# Altium PCB Control.PcbDoc
Units mil, origin at the board's own origin, x right, y up, seen from the top; angles counter-clockwise.
Board outline 3347.04 x 2686.23 mil, 2 copper layers (Top Layer, Bottom Layer); 27 components, 23 nets, 148 pads, 106 vias.
Unrouted connection lines stored in the file: 1.
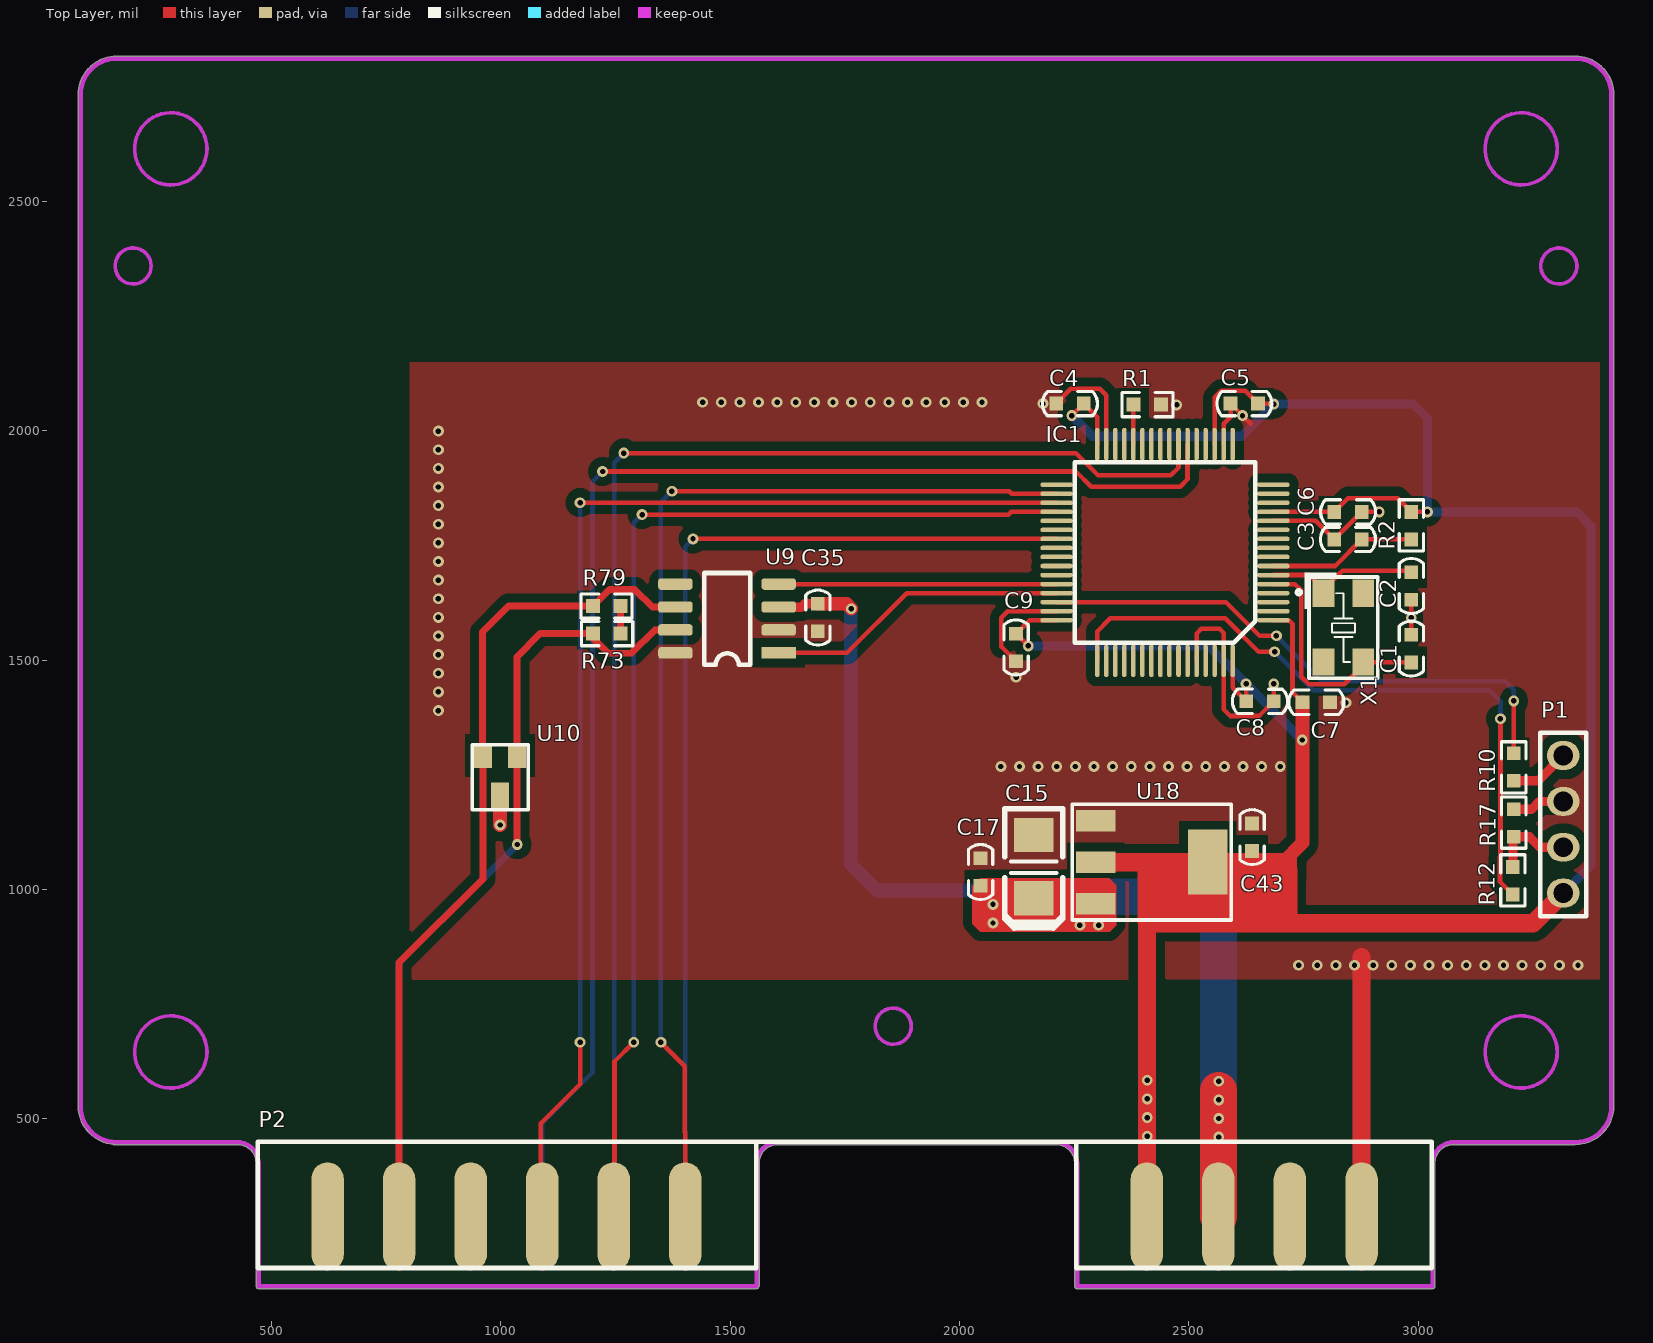
[diagram p0: Top Layer view]
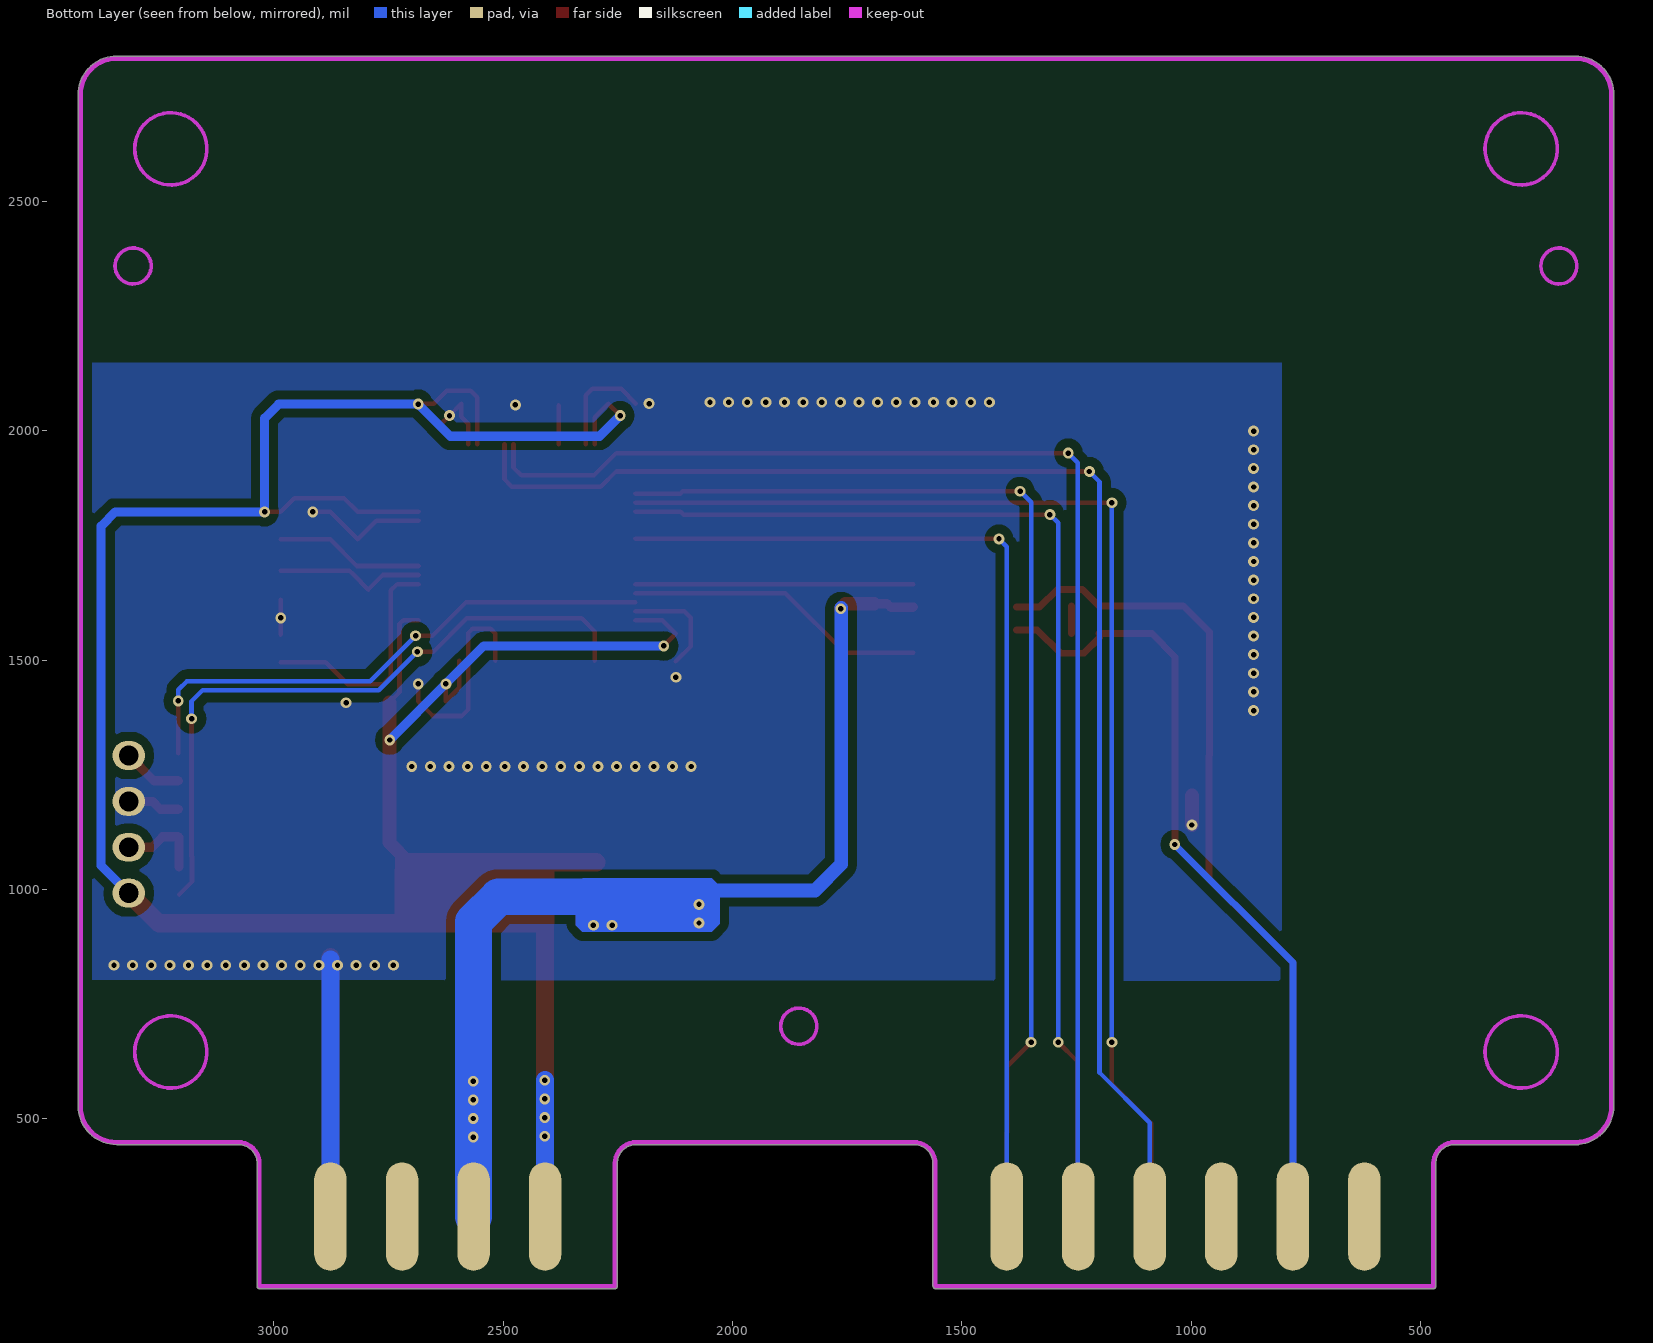
[diagram p1: Bottom Layer view, seen from below]
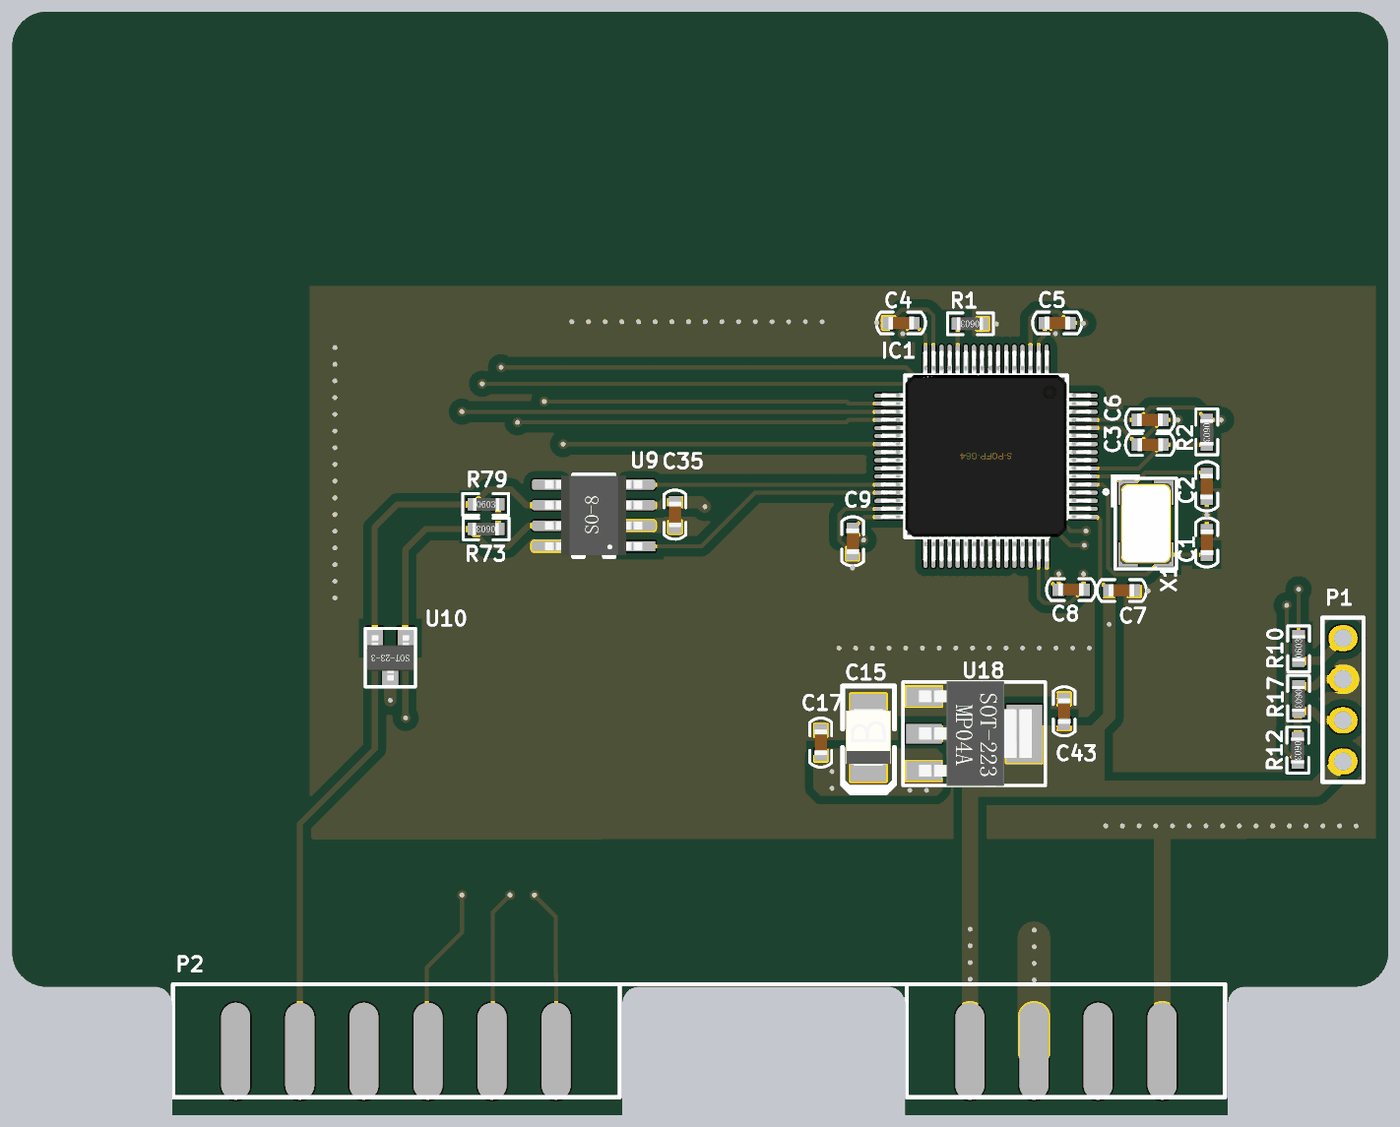
[diagram p2: 3D render of the assembled board from above, using the file's embedded part models]

## Layer stack, top to bottom
Top Layer: signal copper 1.4
Dielectric: core 12.6, FR-4, Dk 4.8
Bottom Layer: signal copper 1.4

## Board outline
466.99,135 ccw(c472,135) 472,129.99 1557,129.99 ccw(c1557,135) 1561.01,131.99 ccw(c1558,136) 1563.01,136 1563.01,403 cw(c1604,403) 1604,443.99 2210,443.99 cw(c2210,403) 2250.99,403 2250.99,135 ccw(c2256,135) 2256,129.99 3031,129.99 ccw(c3031,135) 3036.01,135 3036.01,403 cw(c3077,403) 3077,443.99 3341,443.99 ccw(c3341,449) 3341.63,444.03 ccw(c3342.27,449) 3342.27,443.99 ccw(c3342.27,527.74) 3426.02,527.74 3426.02,2732.46 ccw(c3342.27,2732.46) 3342.27,2816.22 163,2816.22 ccw(c163,2811.2) 162.87,2816.22 ccw(c162.74,2811.2) 162.74,2816.22 ccw(c162.74,2732.46) 78.99,2732.46 78.99,527.74 ccw(c162.74,527.74) 155.18,444.33 ccw(c157,449) 157,443.99 426,443.99 cw(c426,403) 466.99,403

## Design rules (kind name [scope] priority, off if disabled: settings)
Clearance [All] p1: gap=8
PlaneConnect [All] p1: planeconnectstyle=Direct reliefexpansion=20 reliefentries=4 reliefconductorwidth=10 reliefairgap=10
PolygonConnect [All] p1: connectstyle=Direct reliefconductorwidth=10 reliefentries=4 polygonreliefangle="90 Angle" airgapwidth=10
RoutingVias [All] p1: holewidth=28 width=50 viastyle="Through Hole" minholewidth=28 minwidth=50 maxholewidth=28 maxwidth=50
SolderMaskExpansion [All] p1: expansion=4
Width [All] p1: maxlimit=90 minlimit=10 preferedwidth=10
27 further rules are at their usual default settings.

## Components (designator, comment, footprint, x,y, rotation, side; value= is the part's Value field where it differs from the comment)
C1 "20p,50V,J" C0603 2984.72,1495 r90 top
C2 "20p,50V,J" C0603 2984.72,1691.5 r270 top
C3 "100n,50V,J" C0603 2816.72,1763 r0 top
C4 "100n,50V,J" C0603 2210.72,2059 r0 top
C5 "100n,50V,J" C0603 2590.72,2059 r0 top
C6 "100n,50V,J" C0603 2876.72,1823 r180 top
C7 "100n,50V,J" C0603 2807.72,1408 r180 top
C8 "100n,50V,J" C0603 2684.72,1410.13 r180 top
C9 "100n,50V,J" C0603 2123.29,1497.57 r90 top
C15 "22uF/6.3V,K,B" 3528B 2161.72,981 r90 top
C17 "100n,50V,J" C0603 2045.72,1008 r90 top
C35 "100n,50V,J" C0603 1691.17,1562.67 r90 top
C43 "100n,50V,J" C0603 2637.72,1084 r90 top
IC1 "ARM-STM32F103RC" LQFP-64 2467.72,1740 r90 top
P1 "PH2.54-4-V" SIP4 3316,1292 r270 top
P2 "Header 10X2" 805-1 470,175 r0 top
R1 "10K,1/10W,F" R0603 2439,2057 r180 top
R2 "10K,1/10W,F" R0603 2984.74,1823 r270 top
R10 "51,1/10W,F" R0603 3208,1237 r90 top
R12 "51,1/10W,F" R0603 3206,1049 r270 top
R17 "10K,1/10W,F" R0603 3208,1175 r270 top
R73 "60.4,1/10W,F" R0603 1261.17,1557.67 r180 top
R79 "60.4,1/10W,F" R0603 1201.17,1617.67 r0 top
U9 "TJA1050 Transceiver" SOP-8 1493.17,1590.67 r180 top
U10 "NUP2105" SOT-23P 1036,1292 r180 top
U18 "LVR-AMS1117-3.3/4.75-12V" SOT-223 2296.72,1150 r270 top
X1 "8MHz,M" X5032 2791.42,1647.8 r270 top

## Footprints (in the part's own frame and the unit in brackets; to place one, negate y for a bottom-side part, rotate by r counter-clockwise, add the part's x,y. Pads: shape width x height; smd on the part's side, far side on the other; paste and mask are expansions set on the pad)
805-1 [mm]
  oval 1.8x6 smd far side: 1(61.116,2.845) 3(57.156,2.845) 5(53.196,2.845) 7(49.236,2.845) 9(23.675,2.845) 11(19.715,2.845) 13(15.755,2.845) 15(11.795,2.845) 17(7.835,2.845) 19(3.875,2.845)
  oval 1.8x6 smd: 2(61.116,2.845) 4(57.156,2.845) 6(53.196,2.845) 8(49.236,2.845) 10(23.675,2.845) 12(19.715,2.845) 14(15.755,2.845) 16(11.795,2.845) 18(7.835,2.845) 20(3.875,2.845)
  silkscreen extent 0,0 65,6.98
3528B [mm]
  rect 1.9x2.2 smd: 1(0,0) 2(3.5,0)
  silkscreen extent -1.65,-1.6 4.95,1.6, body extent 0.03,-1.4 3.53,1.4, height 1.9
C0603 [mil]
  rect 30x30 smd: 1(0,0) 2(60,0)
  silkscreen extent -30,-27 90,27, body extent -1,-16 62,15, height 24
LQFP-64 [mm]
  oval 0.25x1.8 smd: 1(-3.888,-5.492) 2(-3.388,-5.492) 3(-2.888,-5.492) 4(-2.388,-5.492) 5(-1.888,-5.492) 6(-1.388,-5.492) 7(-0.888,-5.492) 8(-0.388,-5.492) 9(0.112,-5.492) 10(0.612,-5.492) 11(1.112,-5.492) 12(1.612,-5.492) 13(2.112,-5.492) 14(2.612,-5.492) 15(3.112,-5.492) 16(3.612,-5.492) 33(3.612,6.508) 34(3.112,6.508) 35(2.612,6.508) 36(2.112,6.508) 37(1.612,6.508) 38(1.112,6.508) 39(0.612,6.508) 40(0.112,6.508) 41(-0.388,6.508) 42(-0.888,6.508) 43(-1.388,6.508) 44(-1.888,6.508) 45(-2.388,6.508) 46(-2.888,6.508) 47(-3.388,6.508) 48(-3.888,6.508)
  oval 1.8x0.25 smd: 17(5.862,-3.242) 18(5.862,-2.742) 19(5.862,-2.242) 20(5.862,-1.742) 21(5.862,-1.242) 22(5.862,-0.742) 23(5.862,-0.242) 24(5.862,0.258) 25(5.862,0.758) 26(5.862,1.258) 27(5.862,1.758) 28(5.862,2.258) 29(5.862,2.758) 30(5.862,3.258) 31(5.862,3.758) 32(5.862,4.258) 49(-6.138,4.258) 50(-6.138,3.758) 51(-6.138,3.258) 52(-6.138,2.758) 53(-6.138,2.258) 54(-6.138,1.758) 55(-6.138,1.258) 56(-6.138,0.758) 57(-6.138,0.258) 58(-6.138,-0.242) 59(-6.138,-0.742) 60(-6.138,-1.242) 61(-6.138,-1.742) 62(-6.138,-2.242) 63(-6.138,-2.742) 64(-6.138,-3.242)
  silkscreen extent -5.14,-4.49 4.86,5.51, body extent -6.65,-6.02 6.4,7.03, height 1.58
R0603 [mil]
  rect 30x30 smd: 1(0,0) 2(60,0)
  silkscreen extent -27,-27 85,27, body extent -1,-16 62,15, height 18
SIP4 [mm]
  oval 1.6x1.801 hole 1.1: 1(0,0) 2(2.54,0) 3(5.08,0) 4(7.62,0)
  silkscreen extent -1.27,-1.27 8.89,1.27
SOP-8 [mil]
  round 20 on Top Overlay: 0(-28.5,62.8)
  rect 75x25 smd: 1(-112.5,75)
  rrect50% 75x25 smd: 2(-112.5,25) 3(-112.5,-25) 4(-112.5,-75) 5(112.5,-75) 6(112.5,-25) 7(112.5,25) 8(112.5,75)
  silkscreen extent -50,-99 50,101, body extent -118,-96 118,96
SOT-23P [mm]
  rect 1x1.4 smd: 1(0,0) 2(1.9,0) 3(0.95,2.2)
  silkscreen extent -0.6,-0.6 2.5,3, body extent -0.51,-0.18 2.39,2.62
SOT-223 [mm]
  rect 1.2x2.2 smd: 1(0,0) 2(2.3,0) 3(4.6,0)
  rect 3.6x2.2 smd: 4(2.3,6.2)
  silkscreen extent -0.9,-1.3 5.5,7.5, body extent -0.97,-0.31 5.53,6.66
X5032 [mm]
  rect 1.5x1.2 smd: 1(0.056,0.043) 2(3.856,2.243) 3(3.856,0.043) 4(0.056,2.243)
  silkscreen extent -1.09,-1.45 4.76,3.04, body extent -0.54,-0.46 4.46,2.74, height 1

## Part data
C1 C2: library part 30602019
C3 C4 C5 C6 C7 C8 C9 C17 C35 C43: library part 30602059
C15: library part 30603403
IC1: library part 30613205
P1: library part 30609103
P2: "Header, 10-Pin, Dual row"
R1 R2 R17: library part 30601099
R10 R12: library part 30601043
R73 R79: library part 30601045
U9: library part 30613501
U10: library part 30613517
U18: library part 30614001
X1: library part 30612002

## Via types
v1: diameter 23.62, hole 11.81, Top Layer to Bottom Layer, tented both sides, 106 vias

## Nets (pads, with @x,y where several pads share a name; then routed paths per layer and width w, separated by ;. In a path a pad name is that pad's centre, name@x,y a point inside that pad or via, vN(x,y) a via of type N, cw(c..) or ccw(c..) an arc to the next point about the centre after c; other vN are vias at no path point)
+3.3V: C4.2 C5.2 C6.2 C7.2 C8.2 C9.2 C43.1 IC1.1 IC1.13 IC1.19 IC1.32 IC1.48 IC1.64 P1.4 P2.7 P2.8 R2.1 U18.2 U18.4 | length 6808.6
  Top Layer w10: v1(2149.86,1531) C9.2 2152.65,1586.93 IC1.48 ; v1(2244.72,2033) C4.2 2300.09,2029.64 IC1.32 ; IC1.19 2555.99,2072.65 2570.34,2087 2622.72,2087 C5.2 v1@2684.72,2059 ; IC1.64 2595.36,1439.5 C8.2 v1(2624.72,1448) ; IC1.1 2717.8,1586.93 2725.72,1579 2725.72,1430 C7.2 ; IC1.13@2684.09,1823 C6.2 2846.72,1853 2954.74,1853 R2.1 v1(3019.72,1823)
  Top Layer w30: 2705.45,1059.45 2747.72,1101.72 C7.2
  Top Layer w40: U18.2 U18.4 2705.45,1059.45 ; P2.8 2408.44,926 3250,926 P1.4
  Bottom Layer w20: v1(2149.86,1531) 2541.72,1531 v1(2624.72,1448) v1(2747,1325.72) ; v1(2244.72,2033) 2289.72,1988 2614.72,1988 v1(2684.72,2058) 2989,2058 3019.72,2027.28 v1(3019.72,1823) 3345,1823 3376,1792 3376,1052 P1.4
  Bottom Layer w40: P2.7 v1@2408.44,584
  other v1: 2409,462.2 2409,502.8 2409,543.4 2409,584
CAN_H_01: P2.17 R73.2 U9.7 U10.1 | length 1729.3
  Top Layer w15: v1@1035,1098 1035,1507 1085.67,1557.67 R73.2 ; R73.2@1200.17,1548.67 1233.84,1515 1285,1515 1335.67,1565.67 U9.7
  Bottom Layer w15: P2.17 778.45,599.45 778.45,840.45 v1(1036,1098)
CAN_L_01: P2.18 R79.1 U9.6 U10.2 | length 1824.7
  Top Layer w15: P2.18 778.45,840.45 961.2,1023.2 U10.2 ; U10.2@960.2,1292 960.2,1561.2 1016.67,1617.67 R79.1 1237.5,1654 1292,1654 1330.33,1615.67 U9.6
CAN_RX: IC1.44 U9.4 | length 605.8
  Top Layer w10: U9.4 IC1.44
CAN_TX: IC1.45 U9.1 | length 659.8
  Top Layer w10: U9.1 1754.67,1515.67 1884.98,1645.98 IC1.45
CLK_A: IC1.49 R12.2 | length 1462.8
  Top Layer w10: IC1.49 2300.09,1562.36 2328.72,1591 2578.72,1591 2651.72,1518 v1(2686.72,1518) ; v1(3179,1372) 3179,1072.38 3178,1071.38 3178,1017 R12.2
  Bottom Layer w10: v1(2686.72,1518) 2770.72,1434 3155,1434 3179,1410 v1(3179,1372)
GND: C1.2 C2.2 C3.1 C4.1 C5.1 C6.1 C7.1 C8.1 C9.1 C15.2 C17.2 C35.1 C43.2 IC1.12 IC1.18 IC1.31 IC1.47 IC1.60 IC1.63 P1.2 P2.1 P2.2 R1.1 R17.1 U9.2 U9.8 U10.3 U18.1 | length 2801.7
  Top Layer w10: C9.1 2091.29,1529.57 2091.29,1592.57 2105.34,1606.61 IC1.47 ; C4.1 2242.72,2091 2305.72,2091 2319.77,2076.95 IC1.31 ; IC1.60 2516.62,1557.9 2526.72,1568 2566.72,1568 2575.68,1559.05 IC1.63 2575.68,1392.18 2589.72,1378.13 2652.72,1378.13 C8.1 v1(2684.72,1448) ; IC1.18 2575.68,2014.95 2590.72,2030 C5.1 v1(2616.72,2033) 2635,2014.72 ; IC1.12 2776.26,1803.46 C3.1 C6.1 v1(2914.72,1823) ; C1.2 C2.2
  Top Layer w20: R17.1 3247,1175 3264,1192 P1.2
  Top Layer w30: v1(998.6,1140.6) U10.3
  Top Layer w40: P2.2@2876.16,224 2876.16,852
  Bottom Layer w40: P2.1 2876.16,847
  other v1: 2739,835 2779.6,835 2820.2,835 2860.8,835 2901.4,835 2942,835 2982.6,835 3023.2,835 3063.8,835 3104.4,835 3145,835 3185.6,835 3226.2,835 3266.8,835 3307.4,835 3348,835 2090,1268 2130.6,1268 2171.2,1268 2211.8,1268 2252.4,1268 2293,1268 2333.6,1268 2374.2,1268 2414.8,1268 2455.4,1268 2496,1268 2536.6,1268 2577.2,1268 2617.8,1268 2658.4,1268 2699,1268 864,1390 2842,1407 864,1430.6 2123.29,1462.57 864,1471.2 864,1511.8 864,1552.4 2984.72,1592 864,1593 864,1633.6 864,1674.2 864,1714.8 864,1755.4 864,1796 864,1836.6 864,1877.2 864,1917.8 864,1958.4 864,1999 2472.98,2056.26 2181.72,2059 1440,2062 1480.6,2062 1521.2,2062 1561.8,2062 1602.4,2062 1643,2062 1683.6,2062 1724.2,2062 1764.8,2062 1805.4,2062 1846,2062 1886.6,2062 1927.2,2062 1967.8,2062 2008.4,2062 2049,2062
NetC1_1: C1.1 IC1.5 X1.2 | length 521.4
  Top Layer w10: IC1.5 2731.06,1665.67 2744.72,1652 2744.72,1464 2761.72,1447 2838.72,1447 2886.72,1495 C1.1
NetC2_1: C2.1 IC1.6 X1.1 | length 331
  Top Layer w10: IC1.6 2761.87,1685.35 X1.1@2793.42,1653.8 ; X1.1@2793.42,1653.69 2826.76,1687.04 2834.72,1695 C2.1@2984.72,1695
NetC3_2: C3.2 IC1.7 R2.2 | length 324.8
  Top Layer w10: IC1.7 2818.76,1705.04 C3.2 R2.2
NetIC1_28: IC1.28 R1.2 | length 84.3
  Top Layer w10: IC1.28 R1.2@2378.83,2055.09
NetP1_1: P1.1 R10.1 | length 130.8
  Top Layer w20: R10.1 3261,1237 P1.1
NetP1_3: P1.3 R12.1 R17.2 | length 181.5
  Top Layer w20: R12.1 R17.2@3206,1113 ; R17.2 3242,1115 3265,1092 P1.3
NetR73_1: R73.1 R79.2 | length 60
  Top Layer w15: R73.1 R79.2
NOTWORK_C\S\3: IC1.39 P2.9 | length 2276.4
  Top Layer w10: v1@1419.09,1764.09 IC1.39
  Bottom Layer w10: P2.9 1402.07,546.93 1402.07,1747.07 v1(1419,1764)
NOTWORK_CLK: IC1.34 P2.10 | length 2454.3
  Top Layer w10: v1(1349,667) 1401.07,614.93 1401.07,470.93 1402.07,470.93 P2.10 ; v1(1373,1868) 2108.72,1868 2114.2,1862.52 IC1.34
  Bottom Layer w10: v1(1349,667) 1349,1844 v1(1373,1868)
NOTWORK_I\N\T\3: IC1.22 P2.13 | length 3050.5
  Top Layer w10: v1(1222,1911) 2253.72,1911 2286.72,1878 2480.72,1878 2496.94,1894.21 IC1.22
  Bottom Layer w10: P2.13 1090.26,491.26 1200,601 1200,1889 v1(1222,1911)
NOTWORK_RST: IC1.23 P2.11 | length 2960.3
  Top Layer w10: v1(1268,1951) 2253.72,1951 2301.72,1903 2460.72,1903 2477.25,1919.53 IC1.23
  Bottom Layer w10: P2.11 1247,287.83 1247,1930 v1(1268,1951)
NOTWORK_SI: IC1.36 P2.12 | length 2459.2
  Top Layer w10: P2.12@1248,288.83 1248,625 v1(1290,667) ; v1(1308,1817.15) 2106.72,1817.15 2112.72,1823.15 IC1.36
  Bottom Layer w10: v1(1290,667) 1290,1799.15 v1(1308,1817.15)
NOTWORK_SO: IC1.35 P2.14 | length 2626.9
  Top Layer w10: P2.14@1087,290.26 1087,490 1173,576 v1(1173,667) ; v1@1173,1842.83 IC1.35
  Bottom Layer w10: v1(1173,667) v1(1173,1843)
SWD_A: IC1.46 R10.2 | length 1215.1
  Top Layer w10: IC1.46 2211.8,1626 2580.72,1626 2653.72,1553 v1(2690.72,1553) ; v1@3207,1412 v1(3208,1411) R10.2
  Bottom Layer w10: v1(2690.72,1553) 2789.72,1454 3189,1454 3208,1435 v1(3208,1411)
VCC+5V: C15.1 C17.1 C35.2 P2.5 P2.6 U9.3 U18.3 | length 2379
  Top Layer w20: U9.3 1606.34,1615 1655,1615 1662.67,1622.67 C35.2
  Top Layer w30: C35.2 1753.33,1622.67 v1(1764,1612)
  Top Layer w80: P2.6 2564.35,562.65
  Bottom Layer w30: v1@1763,1614 1763,1055 1820,998 2115,998
  Bottom Layer w80: 2227,984 2510,984 2564.35,929.65 P2.5
  other v1: 2565,460.2 2565,500.8 2565,541.4 2565,582 2262.4,922 2303,922 2073,927 2073,967.6
VCC+12V: P2.3 P2.4
pads on no net: IC1.2 IC1.3 IC1.4 IC1.8 IC1.9 IC1.10 IC1.11 IC1.14 IC1.15 IC1.16 IC1.17 IC1.20 IC1.21 IC1.24 IC1.25 IC1.26 IC1.27 IC1.29 IC1.30 IC1.33 IC1.37 IC1.38 IC1.40 IC1.41 IC1.42 IC1.43 IC1.50 IC1.51 IC1.52 IC1.53 IC1.54 IC1.55 IC1.56 IC1.57 IC1.58 IC1.59 IC1.61 IC1.62 P2.15 P2.16 P2.19 P2.20 U9.0 U9.5 X1.3 X1.4

## Polygon pours and split planes (outlines as drawn)
GND on Bottom Layer "Top Layer-No Net" (solid, remove dead copper, pour order 2): 3422,803 3424,805 3424,1150 3424,2148 3422,2150 3420,2148 2819,2148 803,2148 801,2150 803,2148 803,1905 803,803 801,801
GND on Top Layer "Top Layer-No Net" (solid, remove dead copper, pour order 2): 3421,804 3423,806 3423,1151 3423,2149 3421,2151 3419,2149 2818,2149 802,2149 800,2151 802,2149 802,1906 802,804 800,802

## Keep-outs
Keep-Out Layer:
  circle w8: c1855.37,702 r39.37
  circle w8: c3224.15,2614.35 r78.74
  circle w8: c3306.37,2359 r39.37
  circle w8: c198.63,2359 r39.37
  circle w8: c280.85,645.85 r78.74
  circle w8: c3224.16,645.85 r78.74
  circle w8: c280.85,2614.35 r78.74
  lines w10: 157,449 426,449 cw(c426,403) 472,403 472,135 1557,135 ; 162.74,449 cw(c162.74,527.74) 84,527.74 84,2732.46 cw(c162.74,2732.46) 162.74,2811.2 ; 163,2811.2 3342.27,2811.2 cw(c3342.27,2732.46) 3421.01,2732.46 3421.01,527.74 cw(c3342.27,527.74) 3342.27,449 ; 1558,136 1558,405 ; 1558,403 cw(c1604,403) 1604,449 ; 1602,449 2210,449 cw(c2210,403) 2256,403 2256,135 3031,135 3031,404 ; 3031,403 cw(c3077,403) 3077,449 ; 3076,449 3341,449

## Other copper
Top Layer:
  rectangle net +3.3V: 2689,1020 2736,1075
  region net VCC+5V: 2326.72,1024 2341.72,1009 2341.72,922 2327.72,908 2044.72,908 2027.72,925 2027.72,1007 2044.72,1024
  region net +3.3V: 2439.72,1070 2440.72,1071 2709.72,1071 2735.72,1045 2735.72,937 2715.72,917 2707.72,925 2388.72,925 2388.72,1041 2409.72,1062
Bottom Layer:
  region net VCC+5V: 2326.72,1024 2341.72,1009 2341.72,922 2327.72,908 2044.72,908 2027.72,925 2027.72,1007 2044.72,1024